# EAGLE board digitboard (EAGLE 6.6.0)
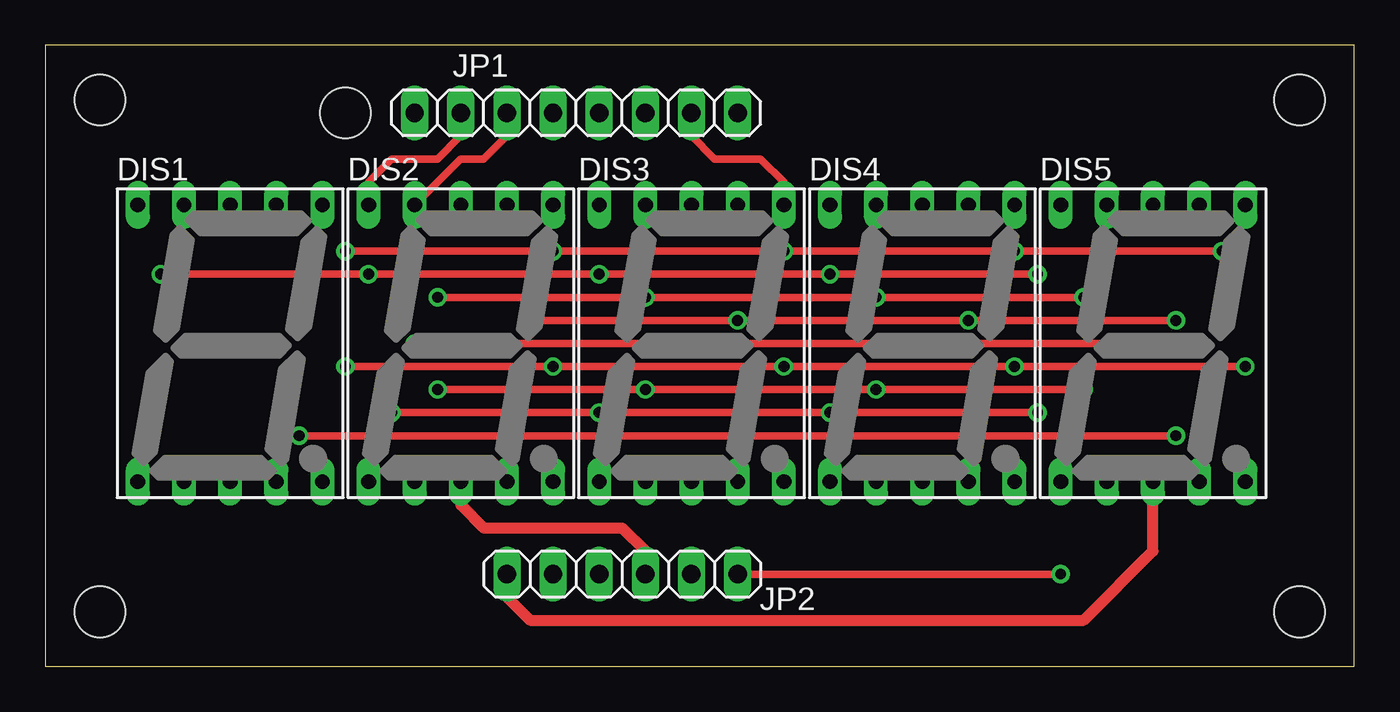
[diagram p0: board, top side]
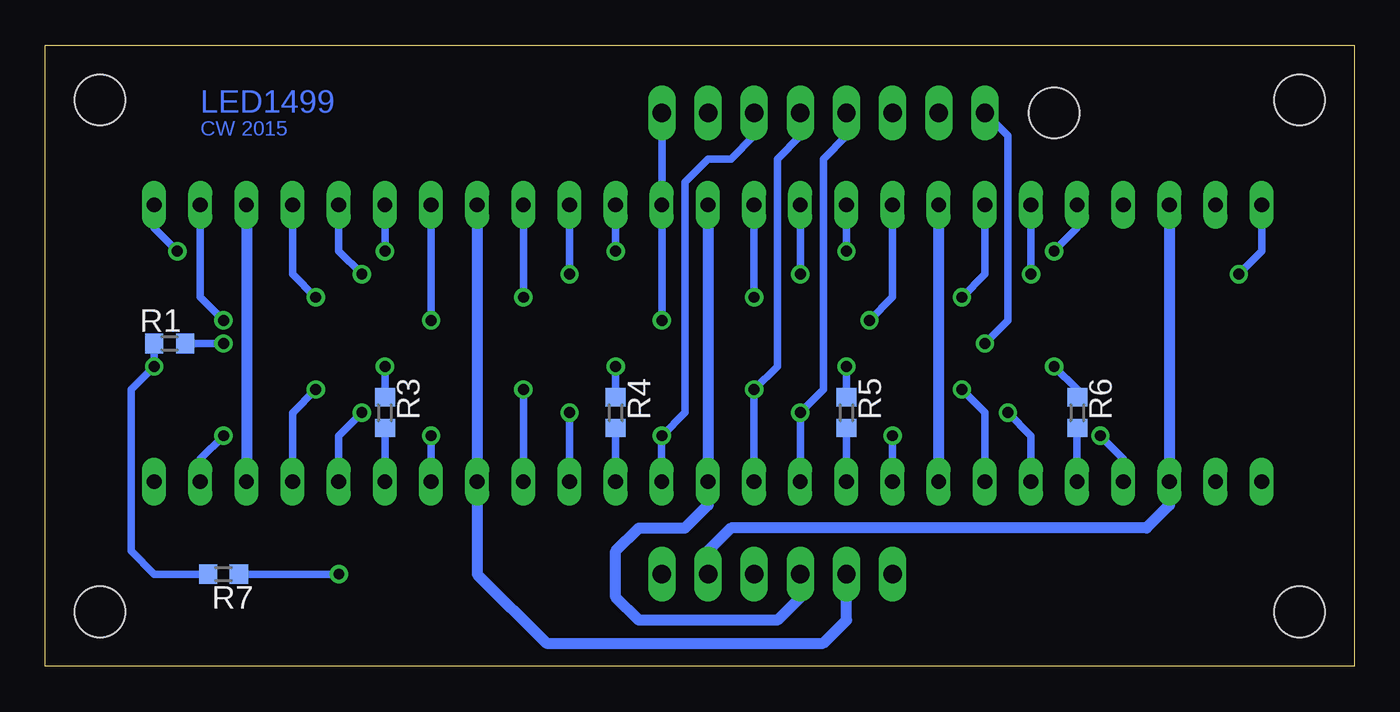
[diagram p1: board, bottom side, seen from below]

Size 72.03 x 34.19 mm. Coordinates in mm from the lower left corner, seen from the top.
Outline: 0,0 72.03,0 72.03,34.19 0,34.19 0,0
Copper layers (1*16): Top 0.035mm / dielectric 1.5mm / Bottom 0.035mm
Design rules "eigene_max1499": minimum track width 10mil, minimum drill 23mil, track to track 6mil, track to pad 6mil, pad to pad 6mil, via to via 6mil, smd to smd 6mil, copper to edge 40mil, drill to drill 8mil, minimum pad ring 10mil, minimum via ring 8mil, stop-mask expansion 4mil, vias tented up to drill 0mil, thermal gap 10mil
Holes 2.8 mm at 3,3 69.03,3 69.03,31.19 3,31.19 16.51,30.48

## Footprints (pad centres in the part's own frame; a part is rotated, then mirrored left to right if it is on the bottom)
HDSP-M = drill 0.813 long: 1 -5.08,-7.62; 2 -2.54,-7.62; 3 0,-7.62; 4 2.54,-7.62; 5 5.08,-7.62; 6 5.08,7.62; 7 2.54,7.62; 8 0,7.62; 9 -2.54,7.62; 10 -5.08,7.62
1X08 = drill 1.016 long: 1 -8.89,0; 2 -6.35,0; 3 -3.81,0; 4 -1.27,0; 5 1.27,0; 6 3.81,0; 7 6.35,0; 8 8.89,0
1X06 = drill 1.016 long: 1 -6.35,0; 2 -3.81,0; 3 -1.27,0; 4 1.27,0; 5 3.81,0; 6 6.35,0
R0603 = smd 1 x 1.1: 1 -0.85,0; 2 0.85,0

## Placement (x,y rotation side)
DIS1  HD-H103  [HDSP-M]  10.17,17.79 0 top
DIS2  HD-H103  [HDSP-M]  22.87,17.79 0 top
DIS3  HD-H103  [HDSP-M]  35.57,17.79 0 top
DIS4  HD-H103  [HDSP-M]  48.27,17.79 0 top
DIS5  HD-H103  [HDSP-M]  60.97,17.79 0 top
JP1  [1X08]  29.21,30.48 180 top
JP2  [1X06]  31.75,5.08 0 top
R1  [R0603]  65.19,17.78 180 bottom
R3  [R0603]  53.34,13.97 270 bottom
R4  [R0603]  40.64,13.97 270 bottom
R5  [R0603]  27.94,13.97 270 bottom
R6  [R0603]  15.24,13.97 270 bottom
R7  [R0603]  62.23,5.08 0 bottom

## Library data of the parts
DIS1-DIS5 = display-hp; OC_FARNELL: unknown; OC_NEWARK: unknown
JP1 JP2 = pinhead
R1 R3-R7 = rcl

## Nets
N$1: JP2.6 R7.2
N$2: R1.2 R3.1 R4.1 R5.1 R6.1 R7.1
N$3: JP1.8 R1.1
N$5: DIS4.5 R3.2
N$6: DIS3.5 R4.2
N$7: DIS2.5 R5.2
N$8: DIS1.5 R6.2
N$42: DIS2.7 DIS3.7 DIS4.7 DIS5.7 JP1.1
N$43: DIS1.6 DIS2.6 DIS3.6 DIS4.6 DIS5.6 JP1.2
N$44: DIS1.4 DIS2.4 DIS3.4 DIS4.4 DIS5.4 JP1.3
N$45: DIS2.2 DIS3.2 DIS4.2 DIS5.2 JP1.4
N$46: DIS2.1 DIS3.1 DIS4.1 DIS5.1 JP1.5
N$47: DIS2.9 DIS3.9 DIS4.9 DIS5.9 JP1.6
N$48: DIS1.10 DIS2.10 DIS3.10 DIS4.10 DIS5.10 JP1.7
N$50: DIS5.3 DIS5.8 JP2.1
N$51: DIS4.3 DIS4.8 JP2.2
N$52: DIS3.3 DIS3.8 JP2.3
N$53: DIS2.3 DIS2.8 JP2.4
N$54: DIS1.3 DIS1.8 JP2.5

## Tracks (layer width: path | path; a pad name or v marks a point on that pad's centre or on a via)
N$1  (via drill 0.6)
  Top 0.406: JP2.6 v55.88,5.08
  Bottom 0.406: v55.88,5.08 R7.2
N$2  (via drill 0.6)
  Top 0.406: v16.51,16.51 v27.94,16.51 v40.64,16.51 v53.34,16.51 v66.04,16.51
  Bottom 0.406: v27.94,16.51 R5.1 | R4.1 v40.64,16.51 | R3.1 v53.34,16.51 | R1.2 v66.04,16.51 67.31,15.24 67.31,6.35 66.04,5.08 R7.1 | R6.1 15.24,15.24 v16.51,16.51
N$3  (via drill 0.6)
  Top 0.406: v20.32,17.78 v62.23,17.78
  Bottom 0.406: v62.23,17.78 R1.1 | JP1.8 19.05,29.21 19.05,19.05 v20.32,17.78
N$5
  Bottom 0.406: R3.2 DIS4.5
N$6
  Bottom 0.406: R4.2 DIS3.5
N$7
  Bottom 0.406: R5.2 DIS2.5
N$8
  Bottom 0.406: R6.2 DIS1.5
N$42  (via drill 0.6)
  Top 0.406: v26.67,19.05 v38.1,19.05 v50.8,19.05 v62.23,19.05
  Bottom 0.406: DIS2.7 25.41,20.33 v26.67,19.05 | v38.1,19.05 DIS3.7 JP1.1 | DIS4.7 v50.81,19.06 v50.8,19.05 | DIS5.7 63.51,20.33 v62.23,19.05
N$43  (via drill 0.6)
  Top 0.406: v16.51,22.86 v27.94,22.86 v40.64,22.86 v53.34,22.86 v64.77,22.86 | JP1.2 35.56,29.21 36.83,27.94 39.37,27.94 40.64,26.67 DIS3.6
  Bottom 0.406: DIS1.6 15.25,24.14 v16.51,22.86 | v27.94,22.86 DIS2.6 | DIS3.6 v40.65,22.87 v40.64,22.86 | DIS4.6 v53.35,22.87 v53.34,22.86 | v64.77,22.86 66.04,24.13 DIS5.6
N$44  (via drill 0.6)
  Top 0.406: v13.97,12.7 v25.4,12.7 v38.1,12.7 v50.8,12.7 v62.23,12.7
  Bottom 0.406: DIS1.4 12.71,11.42 v13.97,12.7 | v25.4,12.7 DIS2.4 | DIS5.4 63.51,11.42 v62.23,12.7 | DIS4.4 v50.8,12.7 | DIS3.4 v38.11,12.69 v38.1,12.7 36.83,13.97 36.83,26.67 35.56,27.94 34.29,27.94 33.02,29.21 JP1.3
N$45  (via drill 0.6)
  Top 0.406: v21.59,15.24 v33.02,15.24 v45.72,15.24 v57.15,15.24
  Bottom 0.406: DIS3.2 v33.03,15.23 v33.02,15.24 31.75,16.51 31.75,27.94 30.48,29.21 JP1.4 | v21.59,15.24 20.32,13.97 DIS2.2 | DIS4.2 v45.73,15.23 v45.72,15.24 | DIS5.2 58.43,13.96 v57.15,15.24
N$46  (via drill 0.6)
  Top 0.406: v19.05,13.97 v30.48,13.97 v43.18,13.97 v54.61,13.97
  Bottom 0.406: DIS4.1 v43.19,13.96 v43.18,13.97 | DIS3.1 v30.48,13.97 29.21,15.24 29.21,27.94 27.94,29.21 JP1.5 | DIS2.1 17.79,12.69 v19.05,13.97 | DIS5.1 55.89,12.69 v54.61,13.97
N$47  (via drill 0.6)
  Top 0.406: v57.15,20.32 v45.72,20.32 v33.02,20.32 v21.59,20.32 | DIS2.9 22.86,27.94 24.13,27.94 25.4,29.21 JP1.6
  Bottom 0.406: DIS5.9 58.43,21.6 v57.15,20.32 | v45.72,20.32 DIS4.9 | DIS3.9 v33.03,20.33 v33.02,20.32 | DIS2.9 20.33,21.6 v21.59,20.32
N$48  (via drill 0.6)
  Top 0.406: v6.35,21.59 v17.78,21.59 v30.48,21.59 v43.18,21.59 v54.61,21.59 | DIS2.10 17.79,26.68 19.05,27.94 21.59,27.94 22.86,29.21 JP1.7
  Bottom 0.406: DIS4.10 v43.19,21.6 v43.18,21.59 | v30.48,21.59 DIS3.10 | DIS1.10 5.09,22.87 v6.35,21.59 | DIS2.10 v17.78,21.59 v17.79,21.6 | DIS5.10 55.89,22.87 v54.61,21.59
N$50
  Top 0.61: JP2.1 25.4,3.81 26.67,2.54 57.15,2.54 60.96,6.35 DIS5.3
  Bottom 0.61: DIS5.8 DIS5.3
N$51
  Bottom 0.61: DIS4.8 DIS4.3 48.26,5.08 44.45,1.27 29.21,1.27 27.94,2.54 JP2.2
N$52
  Bottom 0.61: DIS3.8 DIS3.3 35.56,8.89 36.83,7.62 39.37,7.62 40.64,6.35 40.64,3.81 39.37,2.54 31.75,2.54 30.48,3.81 JP2.3
N$53
  Top 0.61: DIS2.3 22.87,8.88 24.13,7.62 31.75,7.62 33.02,6.35 JP2.4
  Bottom 0.61: DIS2.8 DIS2.3
N$54
  Bottom 0.61: DIS1.8 DIS1.3 10.17,8.88 11.43,7.62 34.29,7.62 35.56,6.35 JP2.5

## Text on the board
Bottom: LED1499 | CW 2015